# Altium PCB PCB1_copy.PcbDoc
Units mm, origin at the board's own origin, x right, y up, seen from the top; angles counter-clockwise.
Board outline 25 x 30 mm, 4 copper layers (Top Layer, Signal Layer 1, Signal Layer 2, Bottom Layer), stack 0.97 mm thick; 84 components, 69 nets, 331 pads, 80 vias.
Unrouted connection lines stored in the file: 72.
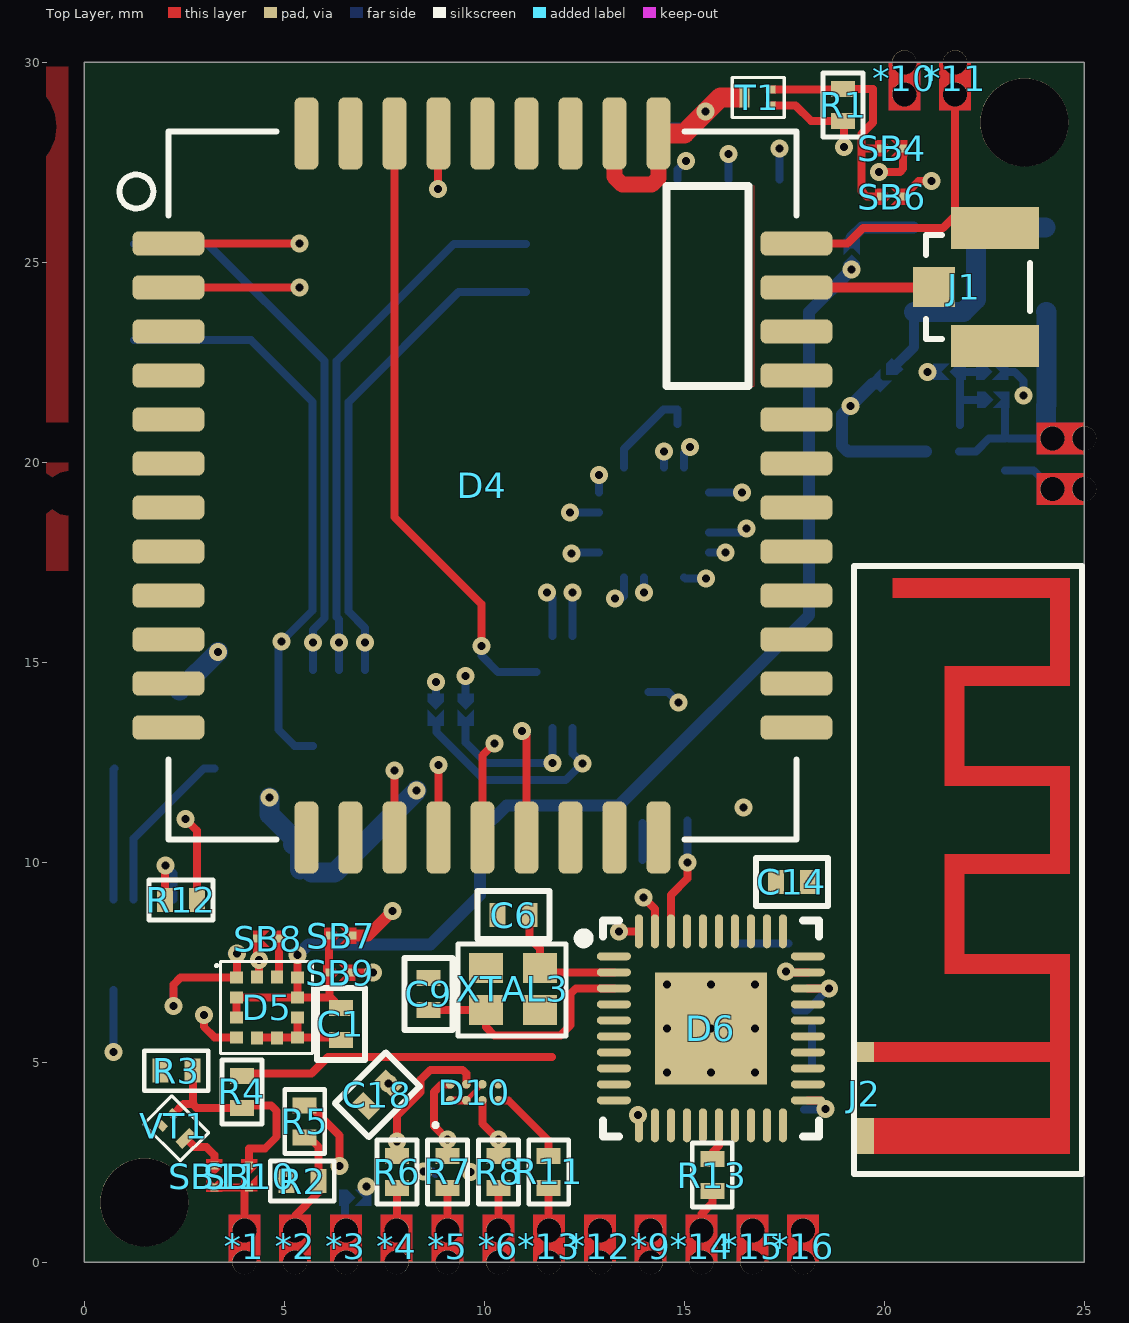
[diagram p0: Top Layer view]
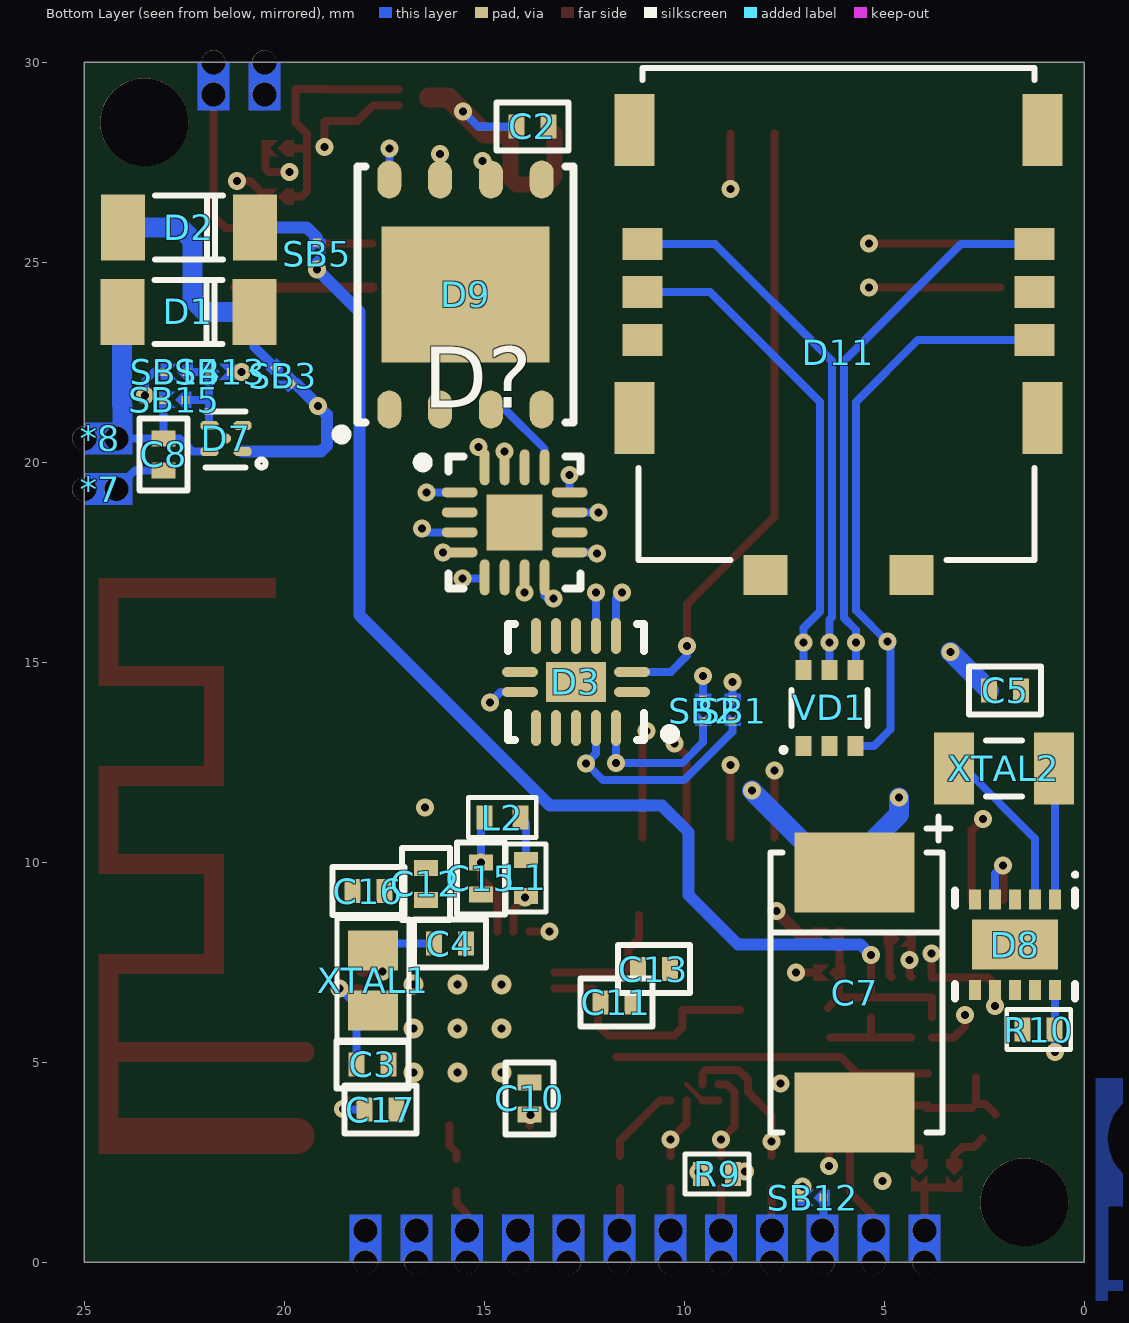
[diagram p1: Bottom Layer view, seen from below]
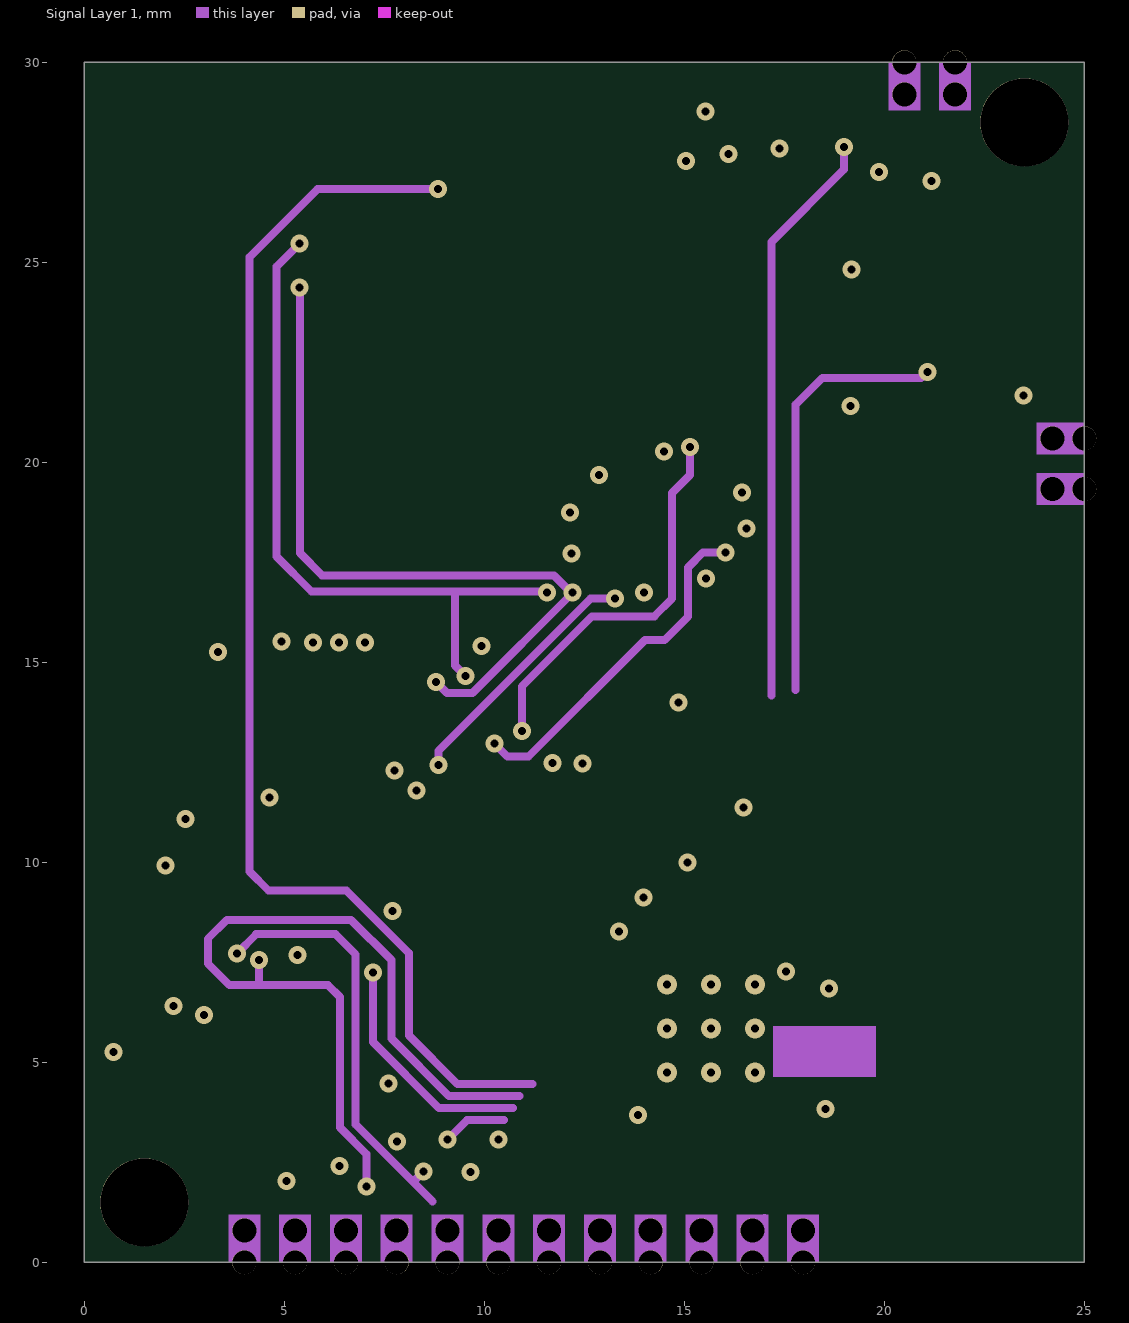
[diagram p2: Signal Layer 1]
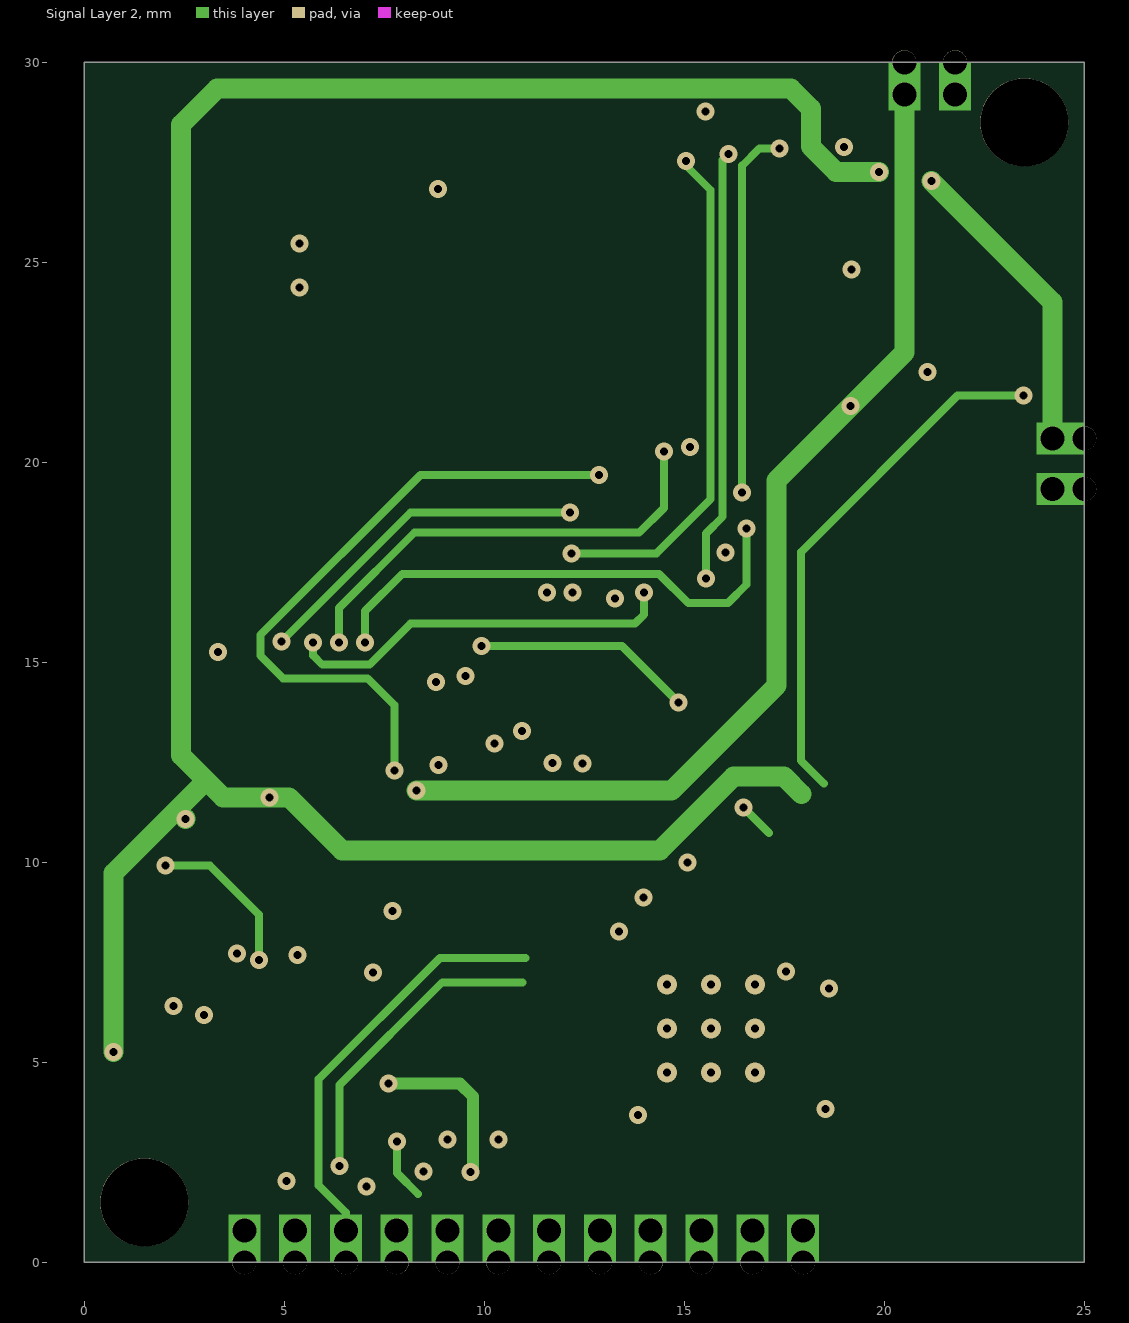
[diagram p3: Signal Layer 2]

## Layer stack, top to bottom
Top Solder: solder mask 0.02, Solder Resist, Dk 3.8
Top Layer: signal copper 0.035
Dielectric 1: core 0.2, FR-4, Dk 4.6
Signal Layer 1: signal copper 0.0175
Dielectric 3: prepreg 0.465, Dk 4.2
Signal Layer 2: signal copper 0.0175
Dielectric 2: core 0.2, Dk 4.6
Bottom Layer: signal copper 0.035
Bottom Solder: solder mask 0.02, Solder Resist, Dk 3.8

## Board outline
0,0 25,0 25,30 0,30

## Design rules (kind name [scope] priority, off if disabled: settings)
Clearance Clearance_GND_ANT [(Net = 'NetD4_19')] p1: gap=0.15 ignorepadtopadclearanceinfootprint=FALSE except(0: Arc-Hole Track-Hole SMDPad-Hole THPad-Hole Via-Hole Fill-Hole Poly-Hole Region-Hole Text-Hole)
Clearance [All] p2: gap=0.1 ignorepadtopadclearanceinfootprint=FALSE except(0: Arc-Hole Track-Hole SMDPad-Hole THPad-Hole Via-Hole Fill-Hole Poly-Hole Region-Hole Text-Hole)
PlaneConnect PlaneConnect_via_ground [(ObjectKind = 'Via') And (Net = 'GND')] p1: planeconnectstyle=Relief reliefexpansion=0.508 reliefentries=4 reliefconductorwidth=0.254 reliefairgap=0.254
PlaneConnect [All] p2: planeconnectstyle=Relief reliefexpansion=0.508 reliefentries=4 reliefconductorwidth=0.254 reliefairgap=0.254
PolygonConnect PolygonConnect_1 [(ObjectKind = 'Via') And (Net = 'GND')] p1: connectstyle=Direct reliefconductorwidth=0.254 reliefentries=4 polygonreliefangle="90 Angle" airgapwidth=0.254
PolygonConnect [All] p2: connectstyle=Relief reliefconductorwidth=0.254 reliefentries=4 polygonreliefangle="90 Angle" airgapwidth=0.254
RoutingVias [All] p1: holewidth=0.2 width=0.45 viastyle="Through Hole" minholewidth=0.2 minwidth=0.45 maxholewidth=0.2 maxwidth=2
SolderMaskExpansion SolderMaskExpansion_via [(ObjectKind = 'Via')] p1: expansion=0 useseparateexpansions=TRUE expansionbottom=0 soldermaskfromhole=TRUE
SolderMaskExpansion [All] p2: expansion=0.102
Width Width_1 [All] p1: maxlimit=0.5 minlimit=0.1 preferedwidth=0.2
Width Width_0_5_Power [InNet('3V3')] p2: maxlimit=1 minlimit=0.2 preferedwidth=0.5
29 further rules are at their usual default settings.

## Components (designator, comment, footprint, x,y, rotation, side; value= is the part's Value field where it differs from the comment)
*1 "PinConnect" PinConnect 4,0 r90 top locked
*2 "PinConnect" PinConnect 5.27,0 r90 top locked
*3 "PinConnect" PinConnect 6.54,0 r90 top locked
*4 "PinConnect" PinConnect 7.81,0 r90 top locked
*5 "PinConnect" PinConnect 9.08,0 r90 top locked
*6 "PinConnect" PinConnect 10.35,0 r90 top locked
*7 "PinConnect" PinConnect 25,19.33 r180 bottom
*8 "PinConnect" PinConnect 25,20.6 r180 bottom
*9 "PinConnect" PinConnect 14.16,0 r90 top
*10 "PinConnect" PinConnect 20.5,30 r270 top
*11 "PinConnect" PinConnect 21.77,30 r270 top
*12 "PinConnect" PinConnect 12.89,0 r90 top locked
*13 "PinConnect" PinConnect 11.62,0 r90 top locked
*14 "PinConnect" PinConnect 15.43,0 r90 top locked
*15 "PinConnect" PinConnect 16.7,0 r90 top locked
*16 "PinConnect" PinConnect 17.97,0 r90 top locked
C1 "100n" C0402 6.411,5.962 r90 top
C2 "100n" C0402 13.798,28.398 r0 bottom
C3 "12p" C0402 17.79,4.95 r0 bottom
C4 "12p" C0402 15.86,7.97 r0 bottom
C5 "100n" C0402 1.98,14.3 r180 bottom
C6 "12p" C0402 10.73,8.68 r0 top
C7 "C_TANTAL" C_TYPE_D 5.74,6.74 r270 bottom
C8 "1u" C0402 23.02,20.2 r90 bottom
C9 "12p" C0402 8.61,6.71 r270 top
C10 "4.7u" C0402 13.87,4.1 r270 bottom
C11 "100n" C0402 11.7,6.5 r0 bottom
C12 "100p" C0402 16.46,9.46 r90 bottom
C13 "4.7u" C0402 10.76,7.33 r0 bottom
C14 "100n" C0402 17.69,9.51 r0 top
C15 "1u" C0402 15.08,9.6 r90 bottom
C16 "47n" C0402 17.9,9.28 r180 bottom
C17 "820p" C0402 17.59,3.82 r0 bottom
C18 "C" C0402 7.326,4.187 r45 top
D1 "LL4148" LL4148 20.746,23.762 r0 bottom
D2 "LL4148" LL4148 20.734,25.876 r0 bottom
D3 "NTS0104BQ-Q100X" QFN14 12.709,14.509 r0 bottom
D4 "SIM7020E" SIM7020E 2.1,25.47 r0 top
D5 "IIS2DH" LGA12 3.808,7.118 r0 top
D6 "NRF52833" QFN40 15.665,5.85 r0 top
D7 "MIC5504-3.3YMT" TDFN4 21.87,20.27 r90 bottom
D8 "PCF85063ATL" DFN2626-10 1.73,7.94 r270 bottom
D9 "eSim" VQFN8 15.47,24.196 r180 bottom
D10 "W25Q80DVBYIG" WLCSP8 9.75,4.25 r90 top
D11 "SimCard" 104224-0820 11.046,23.057 r0 bottom
D? "NLAS3899B" QFN16 14.24,18.5 r180 bottom
J1 "Connector(U.FL)" U.FL 21.24,24.38 r90 top
J2 "ZigZag_PIFA" ZigZag_PIFA 19.498,3.158 r90 top
L1 "L" L0402 13.96,9.56 r90 bottom
L2 "L" L0402 14.5,11.12 r0 bottom
R1 "10k" R0402 18.97,28.93 r270 top
R2 "R" R0402 5.45,2.03 r180 top
R3 "R" R0402 2.3,4.79 r0 top
R4 "R" R0402 3.94,4.26 r90 top
R5 "R" R0402 5.51,3.52 r90 top
R6 "R" R0402 7.815,2.26 r270 top
R7 "R" R0402 9.081,2.26 r270 top
R8 "R" R0402 10.351,2.26 r270 top
R9 "R" R0402 9.18,2.21 r0 bottom
R10 "R" R0402 1.14,5.82 r180 bottom
R11 "R" R0402 11.61,2.26 r270 top
R12 "R" R0402 2.42,9.06 r0 top
R13 "R" R0402 15.7,2.18 r90 top
SB1 "SB" SB 8.79,13.418 r90 bottom
SB2 "SB" SB 9.53,13.418 r90 bottom
SB3 "SB" SB 19.759,21.899 r45 bottom
SB4 "SB" SB 20.57,27.85 r180 top
SB5 "SB" SB 19.18,25.59 r270 bottom
SB6 "SB" SB 20.57,26.64 r180 top
SB7 "SB" SB 6.799,8.167 r180 top
SB8 "SB" SB 4.218,8.091 r0 top
SB9 "SB" SB 6.779,7.241 r180 top
SB10 "SB" SB 4.121,1.771 r90 top
SB11 "SB" SB 3.25,1.77 r90 top
SB12 "SB" SB 7.17,1.62 r180 bottom
SB13 "SB" SB 21.229,22.264 r0 bottom
SB14 "SB" SB 23.094,22.264 r180 bottom
SB15 "SB" SB 23.123,21.559 r180 bottom
T1 "CSD25483F4T" CSD17483F4 16.5,29.12 r90 top
VD1 "SMF05" sot-363 7.02,12.91 r90 bottom
VT1 "CSD17483F4" CSD17483F4 2.54,3.1 r225 top
XTAL1 "32.768 kHz" NX2012SA 17.78,7.79 r270 bottom
XTAL2 "NX3215SA-32. 768K-STD-MUA-14" NX3215SA 3.26,12.35 r180 bottom
XTAL3 "XTAL" NX2016SA 10.04,7.36 r0 top

## Footprints (in the part's own frame and the unit in brackets; to place one, negate y for a bottom-side part, rotate by r counter-clockwise, add the part's x,y. Pads: shape width x height; smd on the part's side, far side on the other; paste and mask are expansions set on the pad)
104224-0820 [mm]
  rect 1x0.8 smd: 1(0,-2.4) 2(0,-1.2) 3(-9.8,-2.4) 4(0,0) 5(-9.8,-1.2) 6(-9.8,0)
  rect 1x1.8 smd: 4(-10,-5.25) 4(-10,1.95) 4(0.2,-5.25) 4(0.2,1.95)
  rect 1.1x1 smd: 11(-3.08,5.875) 12(-6.72,5.875)
  silkscreen extent -9.8,-6.8 0.1,5.5
C0402 [mm]
  rect 0.4x0.6 smd: 1(-0.4,0) 2(0.4,0)
  silkscreen extent -0.9,-0.6 0.9,0.6
C_TYPE_D [mm]
  rect 2x3 smd: 1(-3,0) 2(3,0)
  silkscreen extent -4.4,-2.1 3.5,2.4
CSD17483F4 [mm]
  rect 0.2x0.25 smd: 1(-0.2,-0.65) 2(0.2,-0.65)
  rect 0.5x0.25 smd: 3(0,0)
  silkscreen extent -0.5,-1 0.5,0.3
DFN2626-10 [mm]
  rect 0.5x0.3 smd: 1(-1.13,1) 2(-1.13,0.5) 3(-1.13,0) 4(-1.13,-0.5) 5(-1.13,-1) 6(1.13,-1) 7(1.13,-0.5) 8(1.13,0) 9(1.13,0.5) 10(1.13,1)
  rect 1.25x2.15 smd: 5(0,0)
  silkscreen extent -1.8,-1.5 1.35,1.55, body extent -1.35,-1.35 1.35,1.35, height 0.5
L0402 [mm]
  rect 0.4x0.6 smd: 1(-0.4,0) 2(0.5,0)
  silkscreen extent -0.8,-0.5 0.9,0.5
LGA12 [mm]
  rect 0.325x0.3 smd: 1(0,0) 2(0,-0.5) 3(0,-1) 4(0,-1.5) 7(1.525,-1.5) 8(1.525,-1) 9(1.525,-0.5) 10(1.525,0)
  rect 0.3x0.325 smd: 5(0.513,-1.512) 6(1.012,-1.512) 11(1.012,0.012) 12(0.513,0.012)
  silkscreen extent -0.51,-1.9 1.9,0.4
LL4148 [mm]
  rect 1.1x1.65 smd: 1(0,0) 2(3.3,0)
  silkscreen extent 0.8,-0.8 2.5,0.8
NX2012SA [mm]
  rect 1x1.25 smd: 1(0,0) 2(1.5,0)
  silkscreen extent -0.8,-0.9 2.3,0.9
NX2016SA [mm]
  rect 0.85x0.75 smd: 1(0,-1.05) 2(1.35,0) GND(0,0) GND(1.35,-1.05)
  silkscreen extent -0.7,-1.7 2,0.6
NX3215SA [mm]
  rect 1x1.8 smd: 1(0,0) 2(2.5,0)
  silkscreen extent 0.8,-0.7 1.7,0.7
PinConnect [mm]
  round 0.6 hole 0.6: 1(0,0) 1(0.8,0)
  Bottom Layer region: 0,-0.4 1.2,-0.4 1.2,0.4 0,0.4
  Multi-Layer region: 0,-0.4 1.2,-0.4 1.2,0.4 0,0.4
QFN14 [mm]
  oval 0.9x0.25 smd: 1(-1.4,-0.25) 7(1.4,-0.25) 8(1.4,0.25) 14(-1.4,0.25)
  oval 0.25x0.9 smd: 2(-1,-1.15) 3(-0.5,-1.15) 4(0,-1.15) 5(0.5,-1.15) 6(1,-1.15) 9(1,1.15) 10(0.5,1.15) 11(0,1.15) 12(-0.5,1.15) 13(-1,1.15)
  rect 1.5x1 smd: 15(0,0)
  silkscreen extent -2.47,-1.45 1.7,1.45, body extent -1.55,-1.3 1.55,1.3, height 1
QFN16 [mm]
  oval 0.9x0.25 smd: 1(-1.375,0.75) 2(-1.375,0.25) 3(-1.375,-0.25) 4(-1.375,-0.75) 9(1.375,-0.75) 10(1.375,-0.25) 11(1.375,0.25) 12(1.375,0.75)
  oval 0.25x0.9 smd: 5(-0.75,-1.375) 6(-0.25,-1.375) 7(0.25,-1.375) 8(0.75,-1.375) 13(0.75,1.375) 14(0.25,1.375) 15(-0.25,1.375) 16(-0.75,1.375)
  rect 1.4x1.4 smd: 17(0,0)
  silkscreen extent -2.43,-1.65 1.65,1.65, body extent -1.5,-1.5 1.5,1.5, height 0.9
QFN40 [mm]
  oval 0.85x0.2 smd: 1(-2.425,1.8) 2(-2.425,1.4) 3(-2.425,1) 4(-2.425,0.6) 5(-2.425,0.2) 6(-2.425,-0.2) 7(-2.425,-0.6) 8(-2.425,-1) 9(-2.425,-1.4) 10(-2.425,-1.8) 21(2.425,-1.8) 22(2.425,-1.4) 23(2.425,-1) 24(2.425,-0.6) 25(2.425,-0.2) 26(2.425,0.2) 27(2.425,0.6) 28(2.425,1) 29(2.425,1.4) 30(2.425,1.8)
  oval 0.2x0.85 smd: 11(-1.8,-2.425) 12(-1.4,-2.425) 13(-1,-2.425) 14(-0.6,-2.425) 15(-0.2,-2.425) 16(0.2,-2.425) 17(0.6,-2.425) 18(1,-2.425) 19(1.4,-2.425) 20(1.8,-2.425) 31(1.8,2.425) 32(1.4,2.425) 33(1,2.425) 34(0.6,2.425) 35(0.2,2.425) 36(-0.2,2.425) 37(-0.6,2.425) 38(-1,2.425) 39(-1.4,2.425) 40(-1.8,2.425)
  rect 2.8x2.8 smd: 41(0,0)
  silkscreen extent -3.3,-2.7 2.7,2.7, body extent -2.55,-2.55 2.55,2.55, height 0.9
R0402 [mm]
  rect 0.4x0.6 smd: 1(-0.4,0) 2(0.4,0)
  silkscreen extent -0.8,-0.5 0.8,0.5
SB [mm]
  rect 0.2x0.2 smd: 1(0.1,0) 2(0.652,0)
  Top Layer region: 0.602,0.2 0.402,0 0.602,-0.2 0.802,-0.2 0.802,0.2
  Top Layer pour cut-out: 0,0 0,0.2
  Top Layer region: 0,0.2 0.4,0.2 0.2,0 0.4,-0.2 0,-0.2
SIM7020E [mm]
  rrect50% 1.8x0.6 smd: 1(0,0) 2(0,-1.1) 3(0,-2.2) 4(0,-3.3) 5(0,-4.4) 6(0,-5.5) 7(0,-6.6) 8(0,-7.7) 9(0,-8.8) 10(0,-9.9) 11(0,-11) 12(0,-12.1) 22(15.7,-12.1) 23(15.7,-11) 24(15.7,-9.9) 25(15.7,-8.8) 26(15.7,-7.7) 27(15.7,-6.6) 28(15.7,-5.5) 29(15.7,-4.4) 30(15.7,-3.3) 31(15.7,-2.2) 32(15.7,-1.1) 33(15.7,0)
  rrect50% 0.6x1.8 smd: 13(3.45,-14.85) 14(4.55,-14.85) 15(5.65,-14.85) 16(6.75,-14.85) 17(7.85,-14.85) 18(8.95,-14.85) 19(10.05,-14.85) 20(11.15,-14.85) 21(12.25,-14.85) 34(12.25,2.75) 35(11.15,2.75) 36(10.05,2.75) 37(8.95,2.75) 38(7.85,2.75) 39(6.75,2.75) 40(5.65,2.75) 41(4.55,2.75) 42(3.45,2.75)
  silkscreen extent -1.22,-14.9 15.7,2.8
sot-363 [mm]
  rect 0.5x0.4 smd: 1(0,0) 2(1.9,0) 3(1.9,-0.65) 4(1.9,-1.3) 5(0,-1.3) 6(0,-0.65)
  silkscreen extent -0.15,-1.6 1.4,0.55
TDFN4 [mm]
  oct 0.23x0.45 smd: 1(0,-0.83) 2(0.65,-0.83) 3(0.65,0) 4(0,0)
  round 0.25 smd: 5(0.325,-0.415)
  silkscreen extent -0.4,-1.4 1,0.1
U.FL [mm]
  rect 1x1.05 smd: 1(0,0)
  rect 1.05x2.2 smd: 2(-1.475,-1.525) 2(1.475,-1.525)
  silkscreen extent -1.3,-2.4 1.3,0.2
VQFN8 [mm] "VQFN8"
  oval 0.6x0.95 smd: 1(-1.905,-2.875) 2(-0.635,-2.875) 3(0.635,-2.875) 4(1.905,-2.875) 5(1.905,2.875) 6(0.635,2.875) 7(-0.635,2.875) 8(-1.905,2.875)
  rect 4.2x3.4 smd: 9(0,0)
  silkscreen extent -3.22,-3.62 2.7,3.2, body extent -2.55,-3.05 2.55,3.05, height 0.9
WLCSP8 [mm]
  round 0.22 smd: A1(-0.2,0.6) A2(0.2,0.6) B1(-0.2,0.2) B2(0.2,0.2) C1(-0.2,-0.2) C2(0.2,-0.2) D1(-0.2,-0.6) D2(0.2,-0.6)
  silkscreen extent -0.87,0.92 -0.77,1.02, body extent -0.71,-0.87 0.71,0.86, height 0.44
ZigZag_PIFA [mm]
  rect 0.5x0.5 smd paste+0: 1(2.1,0)
  rect 0.9x0.5 smd paste+0: GND(0,0)
  Top Layer region: 13.45,-1.21 13.95,-1.21 13.95,-0.71 13.45,-0.71
  Top Layer region: 11.25,-5.15 11.75,-5.15 11.75,-4.65 11.25,-4.65
  Top Layer region: 8.75,-2.51 9.25,-2.51 9.25,-2.01 8.75,-2.01
  Top Layer region: 6.55,-2.51 7.05,-2.51 7.05,-2.01 6.55,-2.01
  Top Layer region: 4.05,-2.51 4.55,-2.51 4.55,-2.01 4.05,-2.01
  Top Layer region: 4.05,-5.15 4.55,-5.15 4.55,-4.65 4.05,-4.65
  Top Layer region: -0.448,-5.15 0.452,-5.15 0.452,-4.65 -0.448,-4.65
  Top Layer region: 6.55,-5.15 7.05,-5.15 7.05,-4.65 6.55,-4.65
  Top Layer region: 8.75,-5.15 9.25,-5.15 9.25,-4.65 8.75,-4.65
  Top Layer region: 11.25,-2.51 11.75,-2.51 11.75,-2.01 11.25,-2.01
  Top Layer region: 13.45,-5.15 13.95,-5.15 13.95,-4.65 13.45,-4.65
  Top Layer lines w0.5: 2.1,0 2.1,-1.59 2.1,-4.867 ; 13.7,-0.96 13.7,-4.9 11.5,-4.9 11.5,-2.26 9,-2.26 9,-4.9 6.8,-4.9 6.8,-2.26 4.3,-2.26 4.3,-4.9 0,-4.9
  Top Layer lines w0.9: 0,-0.202 0,-4.7
  silkscreen extent -0.95,-5.45 14.25,0.25

## Part data
C1 C2 C3 C4 C5 C6 C8 C9 C10 C11 C12 C13 C14 C15 C16 C17: library part C
R1: library part R
XTAL2: library part "32.768 kHz"

## Free pads (board coordinates)
  round 2.2 hole 2.2: 1(23.5,28.5) 2(1.5,1.5)

## Via types
v1: diameter 0.45, hole 0.2, Top Layer to Bottom Layer, tented both sides, 45 vias
v2: diameter 0.45, hole 0.2, Top Layer to Bottom Layer, 26 vias
v3: diameter 0.5, hole 0.2, Top Layer to Bottom Layer, 9 vias

## Nets (pads, with @x,y where several pads share a name; then routed paths per layer and width w, separated by ;. In a path a pad name is that pad's centre, name@x,y a point inside that pad or via, vN(x,y) a via of type N, cw(c..) or ccw(c..) an arc to the next point about the centre after c; other vN are vias at no path point)
3V3: *9.1 *10.1 C5.1 C7.1 C13.2 C14.2 C18.2 D3.14 D6.8 D6.9 D6.18 D6.30 D6.40 D7.1 D8.10 D10.A1 D10.B1 D10.C2 D?.14 R9.2 R10.2 R12.2 SB3.1 SB4.1 SB7.1 | length 109.8
  Top Layer w0.12: D10.B1 D10.C2
  Top Layer w0.2: v1(2.53,11.08) 2.82,10.79 R12.2 ; v1(7.6,4.47) C18.2 ; D10.A1 D10.B1 ; v1(9.65,2.26) v1@9.65,2.29 ; v2(13.365,8.275) D6.40 ; v1(19.87,27.26) 20.39,27.26 20.47,27.34 SB4.1 ; *10.1@20.37,29.33 *10.1@20.5,29.2
  Top Layer w0.3: SB7.1 7.088,8.167 v1(7.7,8.779)
  Signal Layer 2 w0.3: v1(7.6,4.47) 9.39,4.47 9.72,4.14 v1@9.72,2.29
  Signal Layer 2 w0.5: v1(0.73,5.26) 0.73,9.728 3.047,12.045 ; v1(2.53,11.08) v1@2.53,11.1 ; v1(8.31,11.79) 14.68,11.79 17.31,14.42 17.31,19.55 20.5,22.74 *10.1@20.5,29.2 ; 17.931,11.705 17.496,12.14 16.23,12.14 14.39,10.3 6.44,10.3 5.12,11.62 v1(4.63,11.62) 3.472,11.62 2.42,12.672 2.42,28.444 3.322,29.346 17.664,29.346 18.162,28.848 18.162,27.896 18.798,27.26 v1(19.87,27.26)
  Bottom Layer w0.2: v1(0.73,5.26) 0.73,6.805 D8.10@0.735,6.81 ; R9.2 9.63,2.26 v1(9.65,2.26)
  Bottom Layer w0.3: SB3.1 19.717,21.97 v1(19.155,21.408) 18.939,21.192 18.939,20.417 19.086,20.27 D7.1
  Bottom Layer w0.5: C5.1 v1(3.34,15.26) ; v1(4.63,11.62) 4.63,11.2 C7.1@5.39,10.44 ; C7.1@5.22,10.44 C7.1@5.39,10.44 ; C7.1@5.39,9.82 C7.1@5.39,10.44 ; C7.1@5.57,10.44 C7.1@5.39,10.44 ; C7.1@5.68,9.74 6.26,9.74 v1(8.31,11.79)
CS_FLASH: D6.33 D10.A2 R7.1 | length 3.8
  Top Layer w0.2: R7.1 v1(9.081,3.065) 8.74,3.406 8.74,4.26 8.93,4.45 D10.A2
  Signal Layer 1 w0.2: v1(9.081,3.065) 9.568,3.552 10.498,3.552
ESIM_CLK: D9.6 D?.9 | length 13.9
  Signal Layer 2 w0.2: v2(12.18,17.72) 14.3,17.72 15.66,19.08 15.66,26.803 15.047,27.416 v1(15.047,27.53)
  Bottom Layer w0.2: v2@12.21,17.75 D?.9 ; D9.6 14.835,27.318 v1(15.047,27.53)
ESIM_DATA: D9.3 D?.13 | length 2.6
  Bottom Layer w0.2: D?.13 13.49,20.33 14.481,21.321 D9.3 D9.3@14.835,20.952
ESIM_RST: D9.7 D?.5 | length 12.1
  Signal Layer 2 w0.2: v2(15.54,17.09) 15.54,18.22 15.96,18.64 15.96,27.563 v1(16.105,27.708)
  Bottom Layer w0.2: D?.5 15.025,17.09 v2(15.54,17.09) ; D9.7 v1(16.105,27.708)
ESIM_VDD: D9.8 D?.1 | length 10.9
  Signal Layer 2 w0.2: v2(16.446,19.244) 16.446,27.416 16.88,27.85 v1(17.376,27.85)
  Bottom Layer w0.2: D?.1 15.621,19.244 v2(16.446,19.244) ; D9.8 D9.8 v1(17.376,27.85)
GND: *7.1 *11.1 *12.1 C1.1 C2.1 C3.1 C4.1 C5.2 C6.1 C7.2 C8.1 C9.1 C10.1 C11.1 C12.1 C13.1 C14.1 C15.1 C16.2 C17.1 C18.1 D3.7 D4.8 D4.13 D4.19 D4.21 D4.27 D4.30 D4.31 D4.33 D4.36 D4.37 D5.5 D5.6 D5.7 D5.8 D6.25 D6.37 D6.41 D7.2 D8.5 D9.1 D10.D2 D11.4 D?.6 J1.2 R2.2 R3.1 VD1.6 VT1.2 | length 11.2
  Top Layer w0.2: D5.5@4.333,5.618 D5.7 ; D5.8 D5.7 ; C1.1@6.355,5.618 D5.7 ; D4.33 19.081,25.47 19.466,25.855 21.465,25.855 21.77,26.16 *11.1@21.77,29.2
  Bottom Layer w0.2: C8.1 23.73,19.8 *7.1@24.2,19.33
  other v1: 5.05,2.03
  other v3: 14.565,4.75 15.665,4.75 16.765,4.75 14.565,5.85 15.665,5.85 16.765,5.85 14.565,6.95 15.665,6.95 16.765,6.95
GSM_1V8: D3.1 D3.8 D4.40 | length 21.9
  Top Layer w0.2: D4.40 7.75,18.632 9.93,16.452 v1(9.93,15.41)
  Signal Layer 1 w0.2: v1(9.93,15.41) v1@9.93,15.439
  Signal Layer 2 w0.2: v1(9.93,15.41) 13.441,15.41 v1(14.855,13.996)
  Bottom Layer w0.2: v1(9.93,15.41) 9.93,15.167 10.338,14.759 D3.1 ; D3.8 14.592,14.259 v1(14.855,13.996)
GSM_PWR: D6.31 R1.2 T1.1 | length 17.1
  Top Layer w0.2: T1.1 17.783,28.92 18.173,28.53 R1.2 ; v1@18.97,27.901 v1(18.994,27.877) R1.2@18.994,28.506
  Signal Layer 1 w0.2: 17.176,14.172 17.176,25.507 18.994,27.325 v1(18.994,27.877)
GSM_PWRKEY: D4.39 D6.14 | length 32.7
  Top Layer w0.2: v1(8.842,26.828) 8.842,28.212 D4.39
  Signal Layer 1 w0.2: v1(8.842,26.828) 5.829,26.828 4.13,25.129 4.13,9.77 4.61,9.29 6.556,9.29 8.118,7.728 8.118,5.667 9.333,4.452 11.203,4.452
GSM_RX: D3.3 D4.2 SB1.2 | length 23.3
  Top Layer w0.2: D4.2 v1(5.381,24.37)
  Signal Layer 1 w0.2: v1(5.381,24.37) 5.389,24.362 5.389,17.731 5.948,17.172 11.74,17.172 12.166,16.746 v1(12.209,16.746) 12.209,16.738 9.706,14.235 9.065,14.235 v1(8.79,14.51)
  Bottom Layer w0.2: SB1.2 v1(8.79,14.51) ; D3.3 v1(12.209,16.746)
GSM_SIM_CLK: D4.16 D?.8 | length 8.9
  Top Layer w0.2: D4.16 v2(8.85,12.43)
  Signal Layer 1 w0.2: v2(8.85,12.43) 8.85,12.786 12.654,16.59 v2(13.27,16.59)
  Bottom Layer w0.2: v2(13.27,16.59) 13.42,16.59 13.49,16.66 D?.8
GSM_SIM_DATA: D4.15 D?.12 | length 18.4
  Top Layer w0.2: D4.15@7.74,10.63 D4.15 D4.15@7.75,11.305 ; v2(7.75,12.3) D4.15@7.75,11.305 ; D4.15@7.876,11.305 D4.15@7.75,11.305
  Signal Layer 2 w0.2: v2(7.75,12.3) 7.75,13.93 7.08,14.6 4.97,14.6 4.4,15.17 4.4,15.68 8.405,19.685 v2(12.865,19.685)
  Bottom Layer w0.2: D?.12 v2(12.865,19.685)
GSM_SIM_DET: D4.14
GSM_SIM_RST: D4.17 D?.4 | length 11.6
  Top Layer w0.2: D4.17 9.95,12.67 v2(10.25,12.97)
  Signal Layer 1 w0.2: v2(10.25,12.97) 10.58,12.64 11.1,12.64 14.02,15.56 14.51,15.56 15.09,16.14 15.09,17.37 15.47,17.75 v2(16.03,17.75)
  Bottom Layer w0.2: D?.4 v2(16.03,17.75)
GSM_SIM_VDD: D4.18 D?.16 | length 13
  Top Layer w0.2: v2(10.94,13.28) 11.05,13.17 D4.18
  Signal Layer 1 w0.2: v2(10.94,13.28) 10.94,14.4 12.69,16.15 14.25,16.15 14.69,16.59 14.69,19.23 15.14,19.68 v2(15.14,20.38)
  Bottom Layer w0.2: D?.16 14.99,20.23 v2(15.14,20.38)
GSM_STATUS: D4.42
GSM_TX: D3.2 D4.1 SB2.2 | length 22.5
  Top Layer w0.2: D4.1 v1(5.385,25.47) ; v1(9.53,14.66) v1@9.554,14.684
  Signal Layer 1 w0.2: v1(5.385,25.47) 4.805,24.89 4.805,17.645 5.684,16.766 9.27,16.766 ; v1(9.53,14.66) 9.27,14.92 9.27,16.766 ; v1(11.564,16.747) 11.545,16.766 9.27,16.766
  Bottom Layer w0.2: SB2.2@9.53,14.08 v1(9.53,14.66) ; v1(11.564,16.747) 11.709,16.602 D3.2
MEMS_INT1: D5.12 D8.4 R12.1 SB8.1 SB12.1 SB13.1 | length 39
  Top Layer w0.2: R12.1 v1@2.02,9.9 ; SB8.1 4.318,7.609 v1(4.37,7.557) 4.37,7.18 D5.12
  Signal Layer 1 w0.2: v1@4.327,7.557 v1(4.37,7.557) 4.37,6.927 ; v1(7.05,1.89) 7.05,2.71 6.39,3.37 6.39,6.63 6.093,6.927 4.37,6.927 ; 10.878,4.152 9.118,4.152 7.676,5.594 7.676,7.555 6.67,8.561 3.562,8.561 3.088,8.087 3.088,7.468 3.629,6.927 4.37,6.927 ; 17.785,14.305 17.785,21.442 18.449,22.106 20.918,22.106 v1(21.076,22.264)
  Signal Layer 2 w0.2: v1(2.035,9.915) 3.145,9.915 4.37,8.69 v1(4.37,7.557)
  Bottom Layer w0.2: v1(2.035,9.915) 2.23,9.72 D8.4 ; v1(7.05,1.89) 7.07,1.87 SB12.1 ; v1(21.076,22.264) SB13.1 SB13.1@21.335,22.264
MEMS_SCL: D5.1 D6.36 D8.7 R9.1 | length 14.4
  Top Layer w0.2: v1(2.23,6.41) 2.23,6.94 2.408,7.118 D5.1 3.82,7.13 v1(3.82,7.724) ; v1@8.41,2.22 8.46,2.27 v1(8.48,2.27)
  Signal Layer 1 w0.2: v1(3.82,7.724) 4.298,8.202 6.278,8.202 6.78,7.7 6.78,3.45 8.704,1.526 ; 8.23,2.02 v1(8.48,2.27)
  Bottom Layer w0.2: v1(2.23,6.41) D8.7 ; v1@3.674,7.724 v1(3.82,7.724) ; v1(8.48,2.27) 8.72,2.27 R9.1
MEMS_SDA: D5.4 D6.35 D8.6 R10.1 | length 1.2
  Top Layer w0.2: v1(2.987,6.186) 2.987,5.891 3.26,5.618 D5.4
MEMS_VDD: D6.4 SB9.1 SB14.1 | length 20.7
  Top Layer w0.2: SB9.1 7.21,7.241 v1(7.214,7.245) ; v1(23.479,21.667) v1@23.506,21.667
  Signal Layer 1 w0.2: v1(7.214,7.245) 7.214,5.506 8.868,3.852 10.718,3.852
  Signal Layer 2 w0.2: 18.486,11.968 17.914,12.54 17.914,17.754 21.827,21.667 v1(23.479,21.667)
  Bottom Layer w0.2: SB14.1@22.998,22.268 SB14.1 23.253,22.264 23.479,22.038 v1(23.479,21.667)
MISO: D6.5 D10.B2 R6.1 | length 5.2
  Top Layer w0.2: R6.1 7.816,2.661 v1(7.816,3.026) 7.816,3.666 8.41,4.26 8.41,4.57 8.65,4.81 9.46,4.81 9.55,4.72 D10.B2
  Signal Layer 2 w0.2: v1(7.816,3.026) 7.816,2.233 8.346,1.703
MOSI: D6.23 D10.D1 R11.1 | length 3
  Top Layer w0.2: D10.D1 10.6,4.05 11.61,3.04 R11.1
  Signal Layer 2 w0.2: v1(16.48,11.37) 17.12,10.73
MPU_RX: D3.13 D6.17 SB2.1 | length 3.8
  Bottom Layer w0.2: SB2.1@9.53,13.528 SB2.1 9.53,13 10.052,12.478 v1(11.709,12.478) D3.13
MPU_TX: D3.12 D6.15 SB1.1 | length 5.6
  Bottom Layer w0.2: SB1.1 8.8,13.508 8.8,13.26 10.007,12.053 12.031,12.053 v1(12.454,12.476) 12.209,12.721 D3.12
Net*1_1: *1.1 SB10.1 SB11.1 | length 1.9
  Top Layer w0.2: SB11.1@3.241,1.871 SB10.1 ; *1.1@4,0.8 4,1.792
Net*2_1: *2.1 R2.1 R5.1 | length 2.6
  Top Layer w0.2: *2.1@5.27,0.8 5.27,1.16 5.86,1.75 5.86,2.88 R5.1@5.63,3.11
Net*3_1: *3.1 D6.7 SB12.2 | length 11.3
  Signal Layer 2 w0.2: *3.1@6.54,0.8 6.54,1.24 5.86,1.92 5.86,4.58 8.89,7.61 11.03,7.61
  Bottom Layer w0.2: SB12.2 6.518,0.822 *3.1@6.54,0.8
Net*4_1: *4.1 R6.2 | length 1.1
  Top Layer w0.2: *4.1@7.815,0.805 R6.2
Net*5_1: *5.1 R7.2 | length 1.1
  Top Layer w0.2: *5.1@9.081,0.801 R7.2
Net*6_1: *6.1 R8.2 | length 1.1
  Top Layer w0.2: *6.1@10.351,0.801 R8.2
Net*13_1: *13.1 R11.2 | length 1
  Top Layer w0.2: *13.1@11.61,0.81 R11.2
Net*14_1: *14.1 R13.1 | length 1.1
  Top Layer w0.2: *14.1@15.43,0.8 15.43,1.21 15.7,1.48 R13.1
Net*15_1: *15.1 D6.19 | length 0.6
  Top Layer w0.2: *15.1@16.7,0.8 *15.1@16.887,0.8
  Signal Layer 1 w0.2: *15.1@16.7,0.8 17.003,1.103
Net*16_1: *16.1 D6.20
NetC1_2: C1.2 D5.2 D5.3 D5.9 D5.10 SB5.2 SB7.2 SB9.2 | length 32.2
  Top Layer w0.2: D5.3 D5.2 D5.9 ; v1(5.333,7.678) D5.10 D5.9 ; 6.099,6.618 D5.9 ; SB7.2@6.119,8.167 6.119,7.249 SB9.2 6.127,6.646 C1.2
  Bottom Layer w0.2: v1(19.18,24.82) SB5.2
  Bottom Layer w0.3: v1(5.333,7.678) 5.605,7.95 8.66,7.95 9.89,9.18 9.89,10.75 10.56,11.42 13.36,11.42 18.12,16.18 18.12,23.76 v1(19.18,24.82)
NetC2_2: C2.2 D4.34 D4.35 T1.3 | length 7.3
  Top Layer w0.4: D4.35 13.25,27.145 13.454,26.941 14.184,26.941 14.35,27.107 D4.34
  Top Layer w0.5: D4.34 15,28.22 15.9,29.12 T1.3@16.378,29.12
  Bottom Layer w0.2: C2.2 15.159,28.398 v1(15.532,28.771)
NetC3_2: C3.2 D6.28 XTAL1.2 | length 2.5
  Top Layer w0.2: D6.28@18.089,6.849 D6.28 v2(18.62,6.85)
  Signal Layer 1 w0.2: v2@18.619,6.849 v2(18.62,6.85)
  Bottom Layer w0.2: XTAL1.2 18.06,6.29 v2(18.62,6.85) ; C3.2 XTAL1.2@18.19,5.88
NetC4_2: C4.2 D6.29 XTAL1.1 | length 1.9
  Top Layer w0.2: v2(17.54,7.274) 17.564,7.25 D6.29
  Bottom Layer w0.2: C4.2 XTAL1.1@17.6,7.97
NetC6_2: C6.2 D6.2 XTAL3.2 | length 3.2
  Top Layer w0.2: C6.2 11.13,8.1 11.39,7.84 XTAL3.2 ; XTAL3.2@11.5,7.25 D6.2
NetC9_2: C9.2 D6.3 XTAL3.1 | length 6.1
  Top Layer w0.2: C9.2 XTAL3.1 10.04,5.88 10.25,5.67 11.9,5.67 12.16,5.93 12.16,6.72 12.29,6.85 D6.3
NetC10_2: C10.2 D6.11 | length 0.3
  Top Layer w0.2: D6.11 D6.11@13.865,3.655
  Signal Layer 1 w0.2: v2(13.84,3.68) v2@13.87,3.68
NetC11_2: C11.2 D6.1
NetC12_2: C12.2 D6.27
NetC15_2: C15.2 C16.1 D6.26 D6.38 L2.2 | length 2.9
  Top Layer w0.2: D6.38 14.665,9.185 15.08,9.6 v2(15.08,10)
  Bottom Layer w0.2: v2(15.08,10) L2.2@15.08,11.04
NetC17_2: C17.2 D6.21 | length 1.1
  Top Layer w0.2: D6.21 18.4,4.05 18.53,3.92 v2(18.53,3.83)
  Bottom Layer w0.2: C17.2 v2@18.52,3.82
NetD1_1: D1.1 D2.2 SB3.2 | length 6.7
  Bottom Layer w0.25: SB3.2 20.746,22.886 D1.1
  Bottom Layer w0.5: D1.1 21.982,23.762 22.29,24.07 22.29,25.55 22.616,25.876 D2.2
NetD2_1: D2.1 SB5.1 | length 1.8
  Bottom Layer w0.3: SB5.1 19.18,25.61 19.446,25.876 D2.1
NetD4_32: D4.32 J1.1 | length 3.4
  Top Layer w0.25: D4.32 J1.1@21.23,24.37
NetD5_11: D5.11 SB8.2 | length 1
  Top Layer w0.2: D5.11 4.87,7.18 SB8.2
NetD6_6: D6.6 R4.2 | length 8
  Top Layer w0.2: R4.2@3.905,4.721 5.681,4.721 6.09,5.13 11.693,5.13
NetD6_16: D6.16 R13.2 | length 0.9
  Top Layer w0.2: R13.2 15.7,2.75 15.865,2.915 D6.16
NetD6_24: D6.24 J2.1
NetD6_39: D6.39 L1.1 | length 1
  Top Layer w0.2: v2(13.98,9.12) 14.265,8.835 D6.39
NetD7_3: D7.3 SB13.2 SB14.2 SB15.2 | length 2.4
  Bottom Layer w0.2: SB13.2 SB13.2@21.887,22.264 ; D7.3@21.887,20.937 21.887,21.877 ; 21.89,21.874 21.887,21.877 ; 21.935,21.559 SB15.2 ; SB14.2 SB13.2@21.887,22.264 ; 21.887,21.877 SB13.2@21.887,22.264
NetD8_1: D8.1 XTAL2.2 | length 3.3
  Bottom Layer w0.2: D8.1@0.735,9.07 0.735,12.325 XTAL2.2
NetD8_2: D8.2 XTAL2.1 | length 4.3
  Bottom Layer w0.2: D8.2 1.23,10.59 2.99,12.35 XTAL2.1
NetL1_2: L1.2 L2.1 | length 0.9
  Bottom Layer w0.2: L1.2 L2.1@13.96,10.98
NetR1_1: R1.1 SB4.2 SB6.2 T1.2 | length 6.1
  Top Layer w0.2: T1.2 R1.1@18.96,29.32 ; R1.1 19.72,29.33 19.72,28.497 19.43,28.207 19.43,26.78 19.57,26.64 SB6.2 ; 19.56,27.85 SB4.2
NetR3_2: R3.2 R4.1 SB10.2 VT1.1 | length 5.4
  Top Layer w0.2: VT1.1 2.477,3.956 2.714,3.956 ; R3.2@2.703,4.612 2.714,4.623 2.714,3.956 ; R4.1@3.905,3.921 4.672,3.921 4.81,3.783 4.81,3.14 4.511,2.841 4.121,2.841 SB10.2 ; R4.1 2.81,3.86 2.714,3.956
NetSB11_2: SB11.2 VT1.3 | length 1.1
  Top Layer w0.2: VT1.3 2.759,2.881 3.049,2.881 3.25,2.68 SB11.2
SCK: D6.34 D10.C1 R8.1 | length 1.6
  Top Layer w0.2: D10.C1 9.95,3.467 v1(10.351,3.066) ; R8.1 v1(10.351,3.066) ; v1@10.37,3.085 v1(10.351,3.066)
SEL_SIM: D6.32 D?.2 D?.10 R5.2 | length 9.3
  Top Layer w0.2: R5.2@5.74,3.81 6.38,3.17 v1(6.38,2.41)
  Signal Layer 2 w0.2: v1(6.38,2.41) 6.38,4.43 8.95,7 10.95,7
SIM_CLK: D11.3 D?.7 VD1.4 | length 24
  Signal Layer 2 w0.2: v2(5.713,15.5) 5.713,15.177 5.95,14.94 7.13,14.94 8.16,15.97 13.77,15.97 13.99,16.19 v2(13.99,16.74)
  Bottom Layer w0.2: D11.3 3.083,25.457 6.01,22.53 6.01,16.11 5.713,15.813 v2(5.713,15.5) VD1.4@5.713,14.81 ; v2(13.99,16.74) D?.7
SIM_DATA: D11.6 D?.11 VD1.5 | length 24
  Signal Layer 2 w0.2: v2(4.925,15.515) 8.16,18.75 v2(12.14,18.75)
  Bottom Layer w0.2: D11.6 4.163,23.057 5.71,21.51 5.71,16.3 v2(4.925,15.515) 4.85,15.44 4.85,13.32 5.26,12.91 VD1.5 ; v2(12.14,18.75) D?.11
SIM_RST: D11.2 D?.3 VD1.2 | length 26
  Signal Layer 2 w0.2: v2(7.02,15.49) 7.02,16.28 7.95,17.21 14.37,17.21 15.1,16.48 16.09,16.48 16.56,16.95 v2(16.56,18.34)
  Bottom Layer w0.2: VD1.2 v2(7.02,15.49) 7.02,15.86 6.61,16.27 6.61,21.51 9.357,24.257 D11.2 ; D?.3 16.47,18.25 v2(16.56,18.34)
SIM_VDD: D11.1 D?.15 VD1.3 | length 25.5
  Signal Layer 2 w0.2: v2(6.37,15.5) 6.37,16.36 8.25,18.24 13.87,18.24 14.49,18.86 v2(14.49,20.27)
  Bottom Layer w0.2: VD1.3 v2(6.37,15.5) 6.37,16.07 6.31,16.13 6.31,22.53 9.237,25.457 D11.1 ; D?.15 v2(14.49,20.27)
VBAT: *8.1 C8.2 D1.2 D7.4 SB6.1 SB15.1 | length 15.1
  Top Layer w0.2: SB6.1 20.86,27.03 v1(21.18,27.03)
  Signal Layer 2 w0.5: v1(21.18,27.03) 24.2,24.01 *8.1@24.2,20.6
  Bottom Layer w0.2: D7.4 22.29,20.27 22.62,20.6 C8.2 ; C8.2@23.022,20.602 SB15.1 ; C8.2@23.12,20.6 23.32,20.6 *8.1@24.2,20.6
  Bottom Layer w0.5: D1.2 24.054,23.754 24.054,21.429 24.046,21.421 24.046,20.754 *8.1@24.2,20.6
pads on no net: D3.4 D3.5 D3.6 D3.9 D3.10 D3.11 D3.15 D4.3 D4.4 D4.5 D4.6 D4.7 D4.9 D4.10 D4.11 D4.12 D4.20 D4.22 D4.23 D4.24 D4.25 D4.26 D4.28 D4.29 D4.38 D4.41 D6.10 D6.12 D6.13 D6.22 D7.5 D8.3 D8.8 D8.9 D9.2 D9.4 D9.5 D9.9 D11.5 D11.11 D11.12 D?.17 J2.GND VD1.1 XTAL3.GND

## Polygon pours and split planes (outlines as drawn)
GND on Top Layer "GND" (solid, remove dead copper, pour order 7): -25.4,29.89 -25.4,-0.11 -0.4,-0.11 -0.4,29.89
no net on Top Layer "Top Layer-No Net" (solid, remove dead copper, pour order 0): 14.56,26.91 14.56,21.9 16.74,21.9 16.75,21.91 16.75,26.9
GND on Bottom Layer "GND" (solid, remove dead copper, pour order 9): -25.287,4.6 -25.287,-25.4 -0.287,-25.4 -0.287,4.6
GND on Signal Layer 1 "GND" (solid, remove dead copper, pour order 13): 27.102,44.059 27.102,14.059 52.102,14.059 52.102,44.059

## Other copper
Signal Layer 1:
  rectangle: 17.22,4.63 19.79,5.91
Multi-Layer:
  pour cut-out: 19.787,17.399 19.787,-0.055 25.082,-0.083 25.082,17.399

## Silkscreen, mask and mechanical layers (free items; w line width, h text height)
Top Solder:
  rectangle: 19.787,-0.083 25.082,17.423
Bottom Solder:
  rectangle: 19.769,-0.083 25.082,17.43
Mechanical 1:
  the board outline again, w0.254